# Allegro board NRF52840DEMO.brd
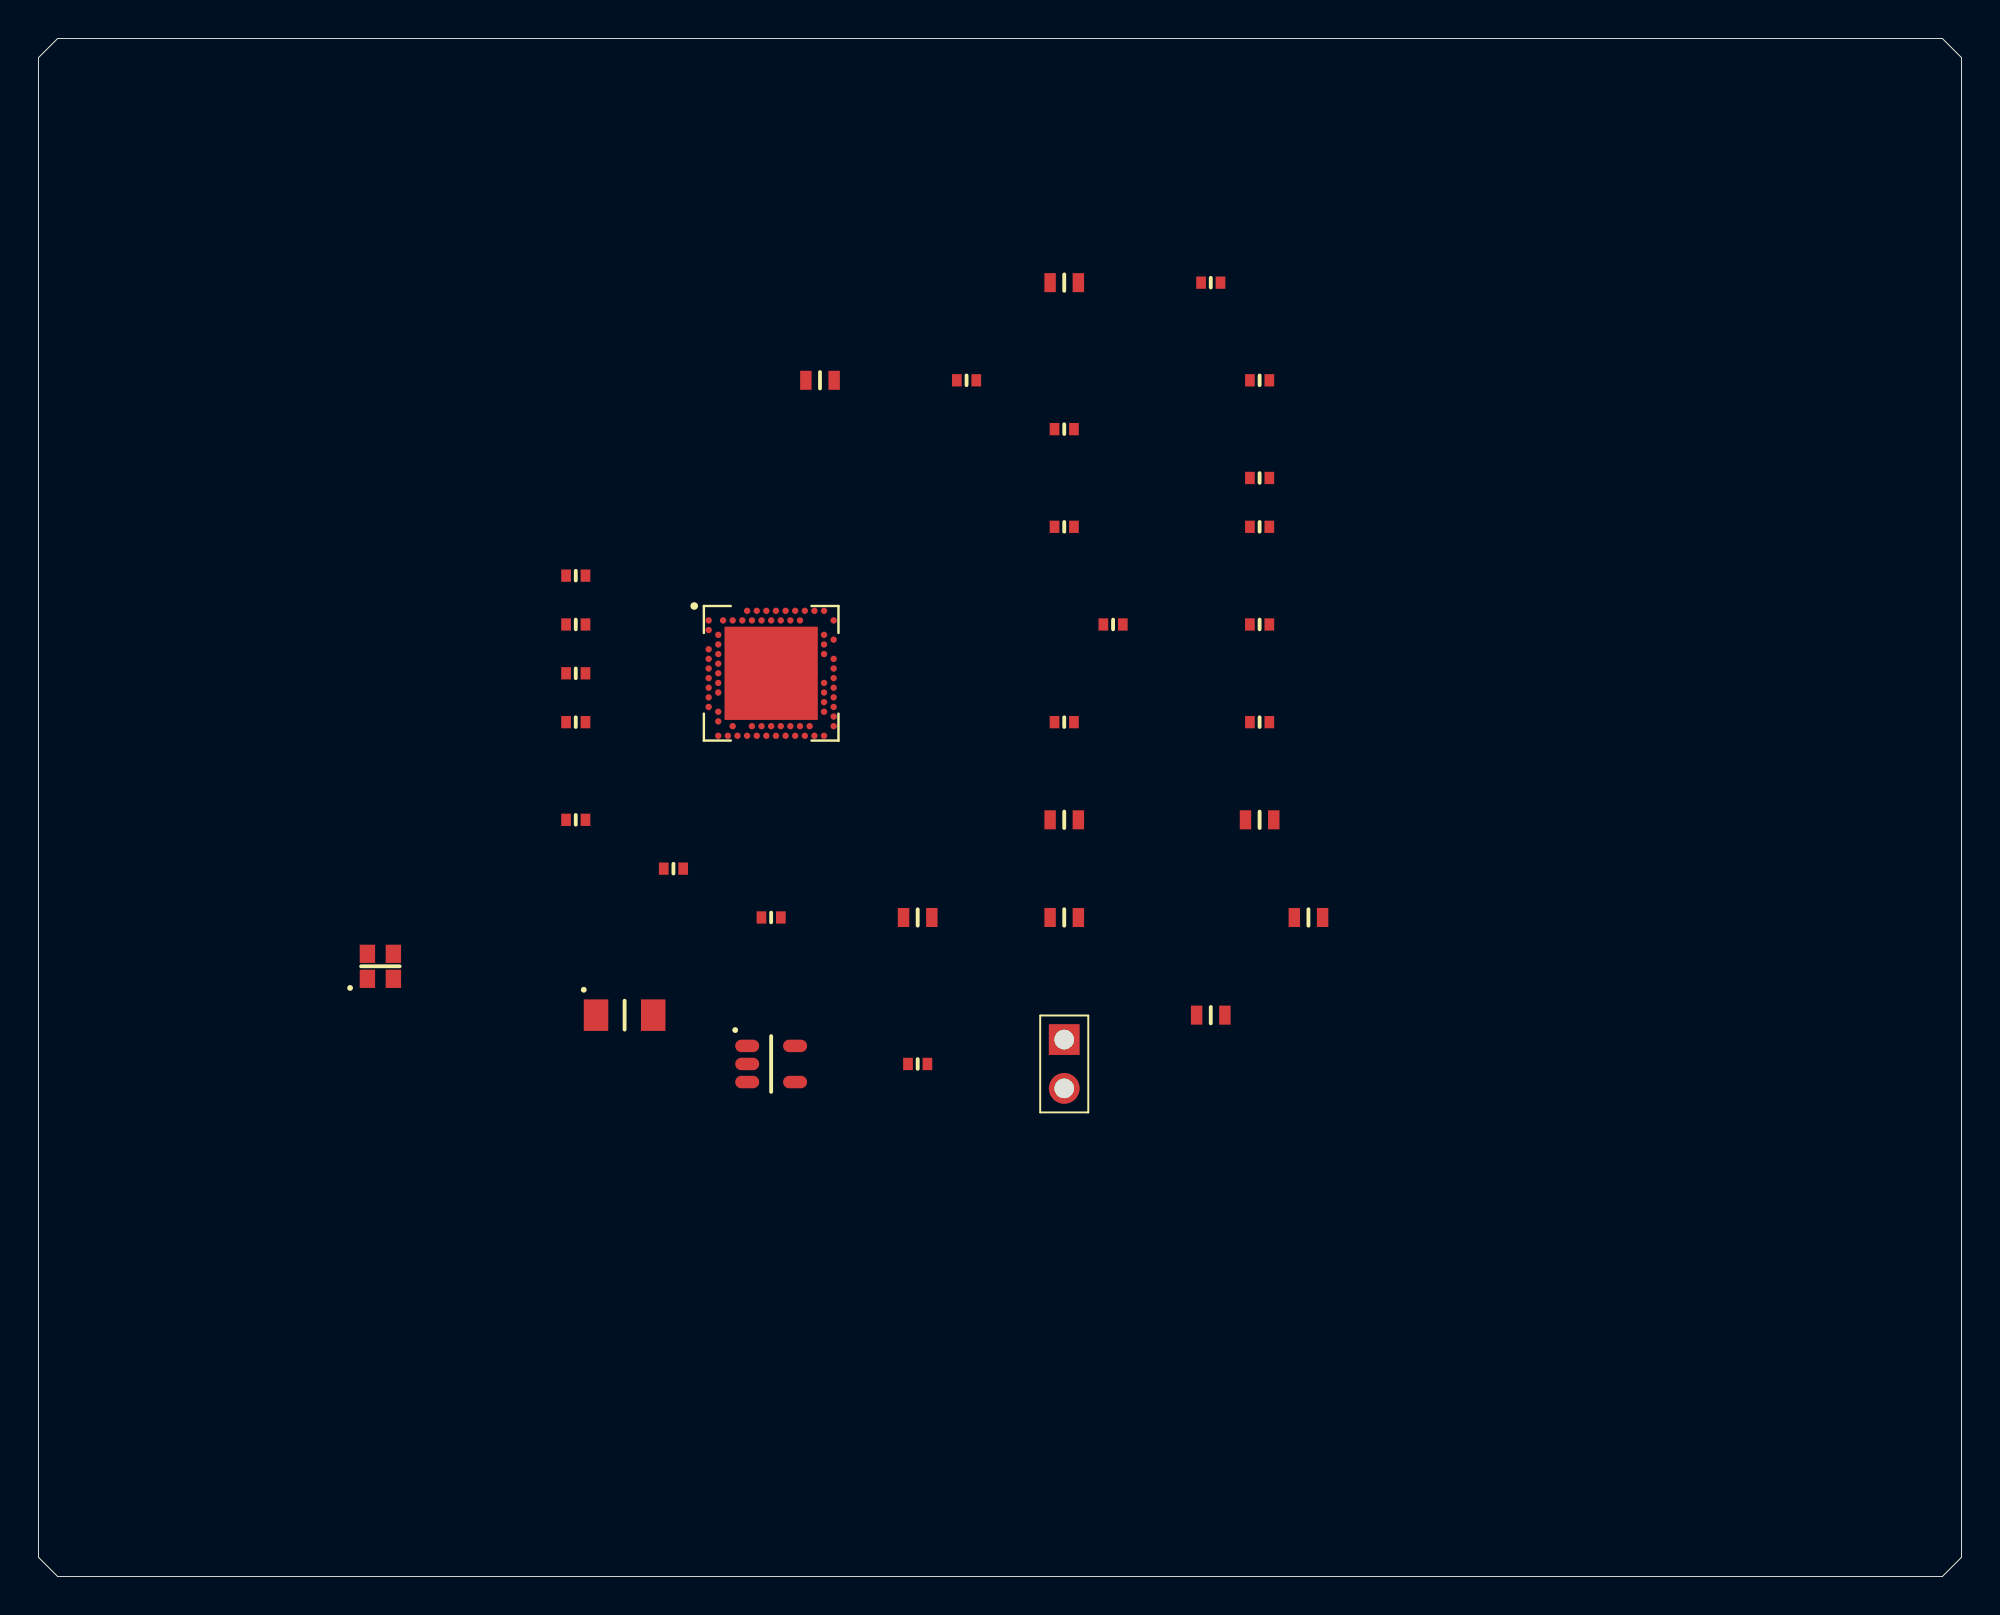
[diagram p0: board, top side]
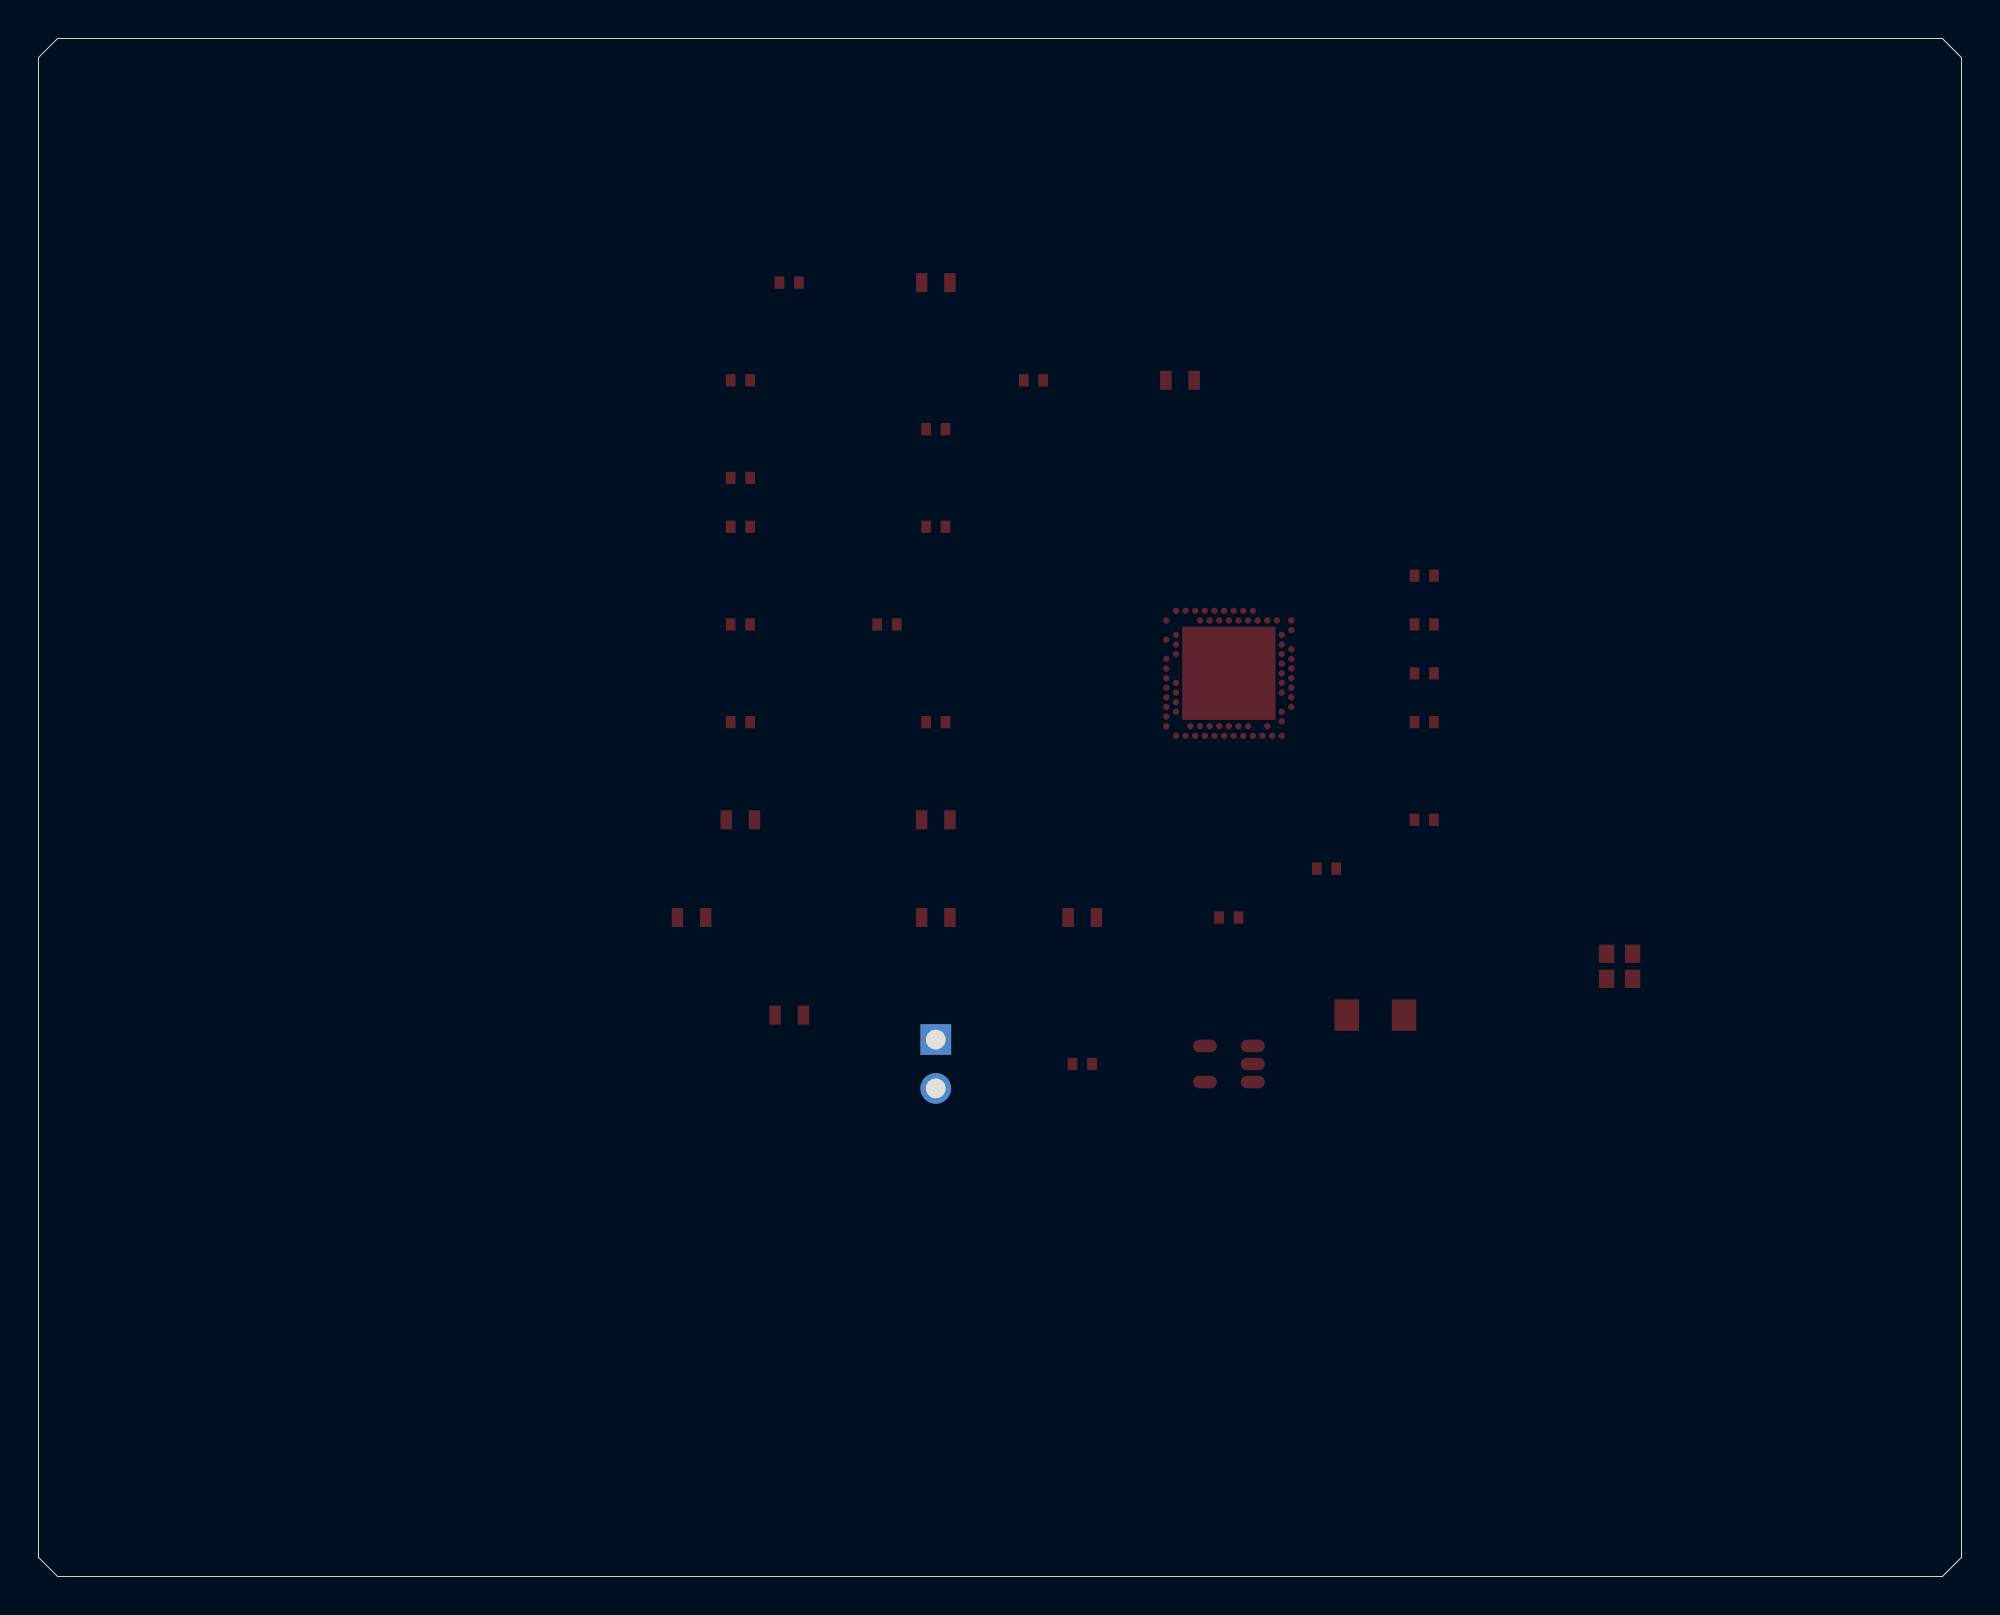
[diagram p1: board, bottom side, seen from below]

Outline 100 x 80 mm; copper layers: TOP, BOTTOM. Coordinates in mm from the lower left corner of the outline.
Outline path: 0,79 0,1 1,0 99,0 100,1 100,79 99,80 1,80 0,79

## Design rules (mm)
constraint set DEFAULT: min track width 0.127

## Placement (name value [footprint] x y rotation side)
C1  1.0pF  [CAPC1005X55N]  27.94 52.06 0 top
C2  1.0pF  [CAPC1005X55N]  27.94 49.52 0 top
C3  DNM  [CAPC1005X55N]  27.94 46.98 0 top
C4  12pF  [CAPC1005X55N]  27.94 44.44 0 top
C5  12pF  [CAPC1005X55N]  27.94 39.36 0 top
C6  12pF  [CAPC1005X55N]  33.02 36.82 0 top
C7  12pF  [CAPC1005X55N]  38.1 34.28 0 top
C8  1.0uF  [CAPC1609X50N]  45.72 34.28 0 top
C9  4.7uF  [CAPC1609X50N]  53.34 34.28 0 top
C10  1.0uF  [CAPC1609X50N]  53.34 39.36 0 top
C11  DNM  [CAPC1005X55N]  53.34 44.44 0 top
C12  0.10uF  [CAPC1005X55N]  55.88 49.52 0 top
C13  DNM  [CAPC1005X55N]  53.34 54.6 0 top
C14  100pF  [CAPC1005X55N]  53.34 59.68 0 top
C15  DNM  [CAPC1005X55N]  48.26 62.22 0 top
C16  1.0uF  [CAPC1609X50N]  40.64 62.22 0 top
C17  4.7uF  [CAPC1609X50N]  53.34 67.3 0 top
C18  820pF  [CAPC1005X55N]  60.96 67.3 0 top
C19  0.10uF  [CAPC1005X55N]  63.5 62.22 0 top
C20  0.10uF  [CAPC1005X55N]  63.5 57.14 0 top
C21  0.10uF  [CAPC1005X55N]  63.5 54.6 0 top
C22  0.10uF  [CAPC1005X55N]  63.5 49.52 0 top
C23  0.10uF  [CAPC1005X55N]  63.5 44.44 0 top
C24  1.0uF  [CAPC1609X50N]  63.5 39.36 0 top
C25  4.7uF  [CAPC1609X50N]  66.04 34.28 0 top
C26  1.0uF  [CAPC1609X50N]  60.96 29.2 0 top
J1  HEADER2  [PIN254-2N]  53.34 26.66 0 top
L1  3.9nH  [INDC1005X45N]  45.72 26.66 0 top
U1  NRF52840-QIAA-R7  [NORDIC_NRF52840-QIAA-R7]  38.1 46.98 0 top
U2  RT9013  [SOT94P279X129-5N]  38.1 26.66 0 top
Y1  32.768KHz  [OSCSC254P320X150X100-2N]  30.48 29.2 0 top
Y2  32MHz  [OSCCC160X200X50-4N]  17.78 31.74 0 top

## Library data of the parts
C1-C26 = CAP NP
J1 = HEADER 2
L1 = INDUCTOR
U1 = NRF52840-QIAA-R7
U2 = RT9013
Y1 = CRYSTAL
Y2 = CRYSTAL13-NDK/SM

## Footprints (pads in the part's own frame, mm; a bottom-side part is the same pattern mirrored in y, then rotated)
CAPC1005X55N
  rect 0.505x0.64 smd: 1(-0.505,0) 2(0.505,0)
CAPC1609X50N
  rect 0.595x0.99 smd: 1(-0.735,0) 2(0.735,0)
INDC1005X45N
  rect 0.505x0.64 smd: 1(-0.505,0) 2(0.505,0)
NORDIC_NRF52840-QIAA-R7
  custom 0.33x0.33 smd: A8(-1.25,3.25) A10(-0.75,3.25) A12(-0.25,3.25) A14(0.25,3.25) A16(0.75,3.25) A18(1.25,3.25) A20(1.75,3.25) A22(2.25,3.25) A23(2.75,3.25) AA24(3.25,-2.25) AB2(-2.75,-2.5) AC5(-2,-2.75) AC9(-1,-2.75) AC11(-0.5,-2.75) AC13(0,-2.75) AC15(0.5,-2.75) AC17(1,-2.75) AC19(1.5,-2.75) AC21(2,-2.75) AC24(3.25,-2.75) AD2(-2.75,-3.25) AD4(-2.25,-3.25) AD6(-1.75,-3.25) AD8(-1.25,-3.25) AD10(-0.75,-3.25) AD12(-0.25,-3.25) AD14(0.25,-3.25) AD16(0.75,-3.25) AD18(1.25,-3.25) AD20(1.75,-3.25) AD22(2.25,-3.25) AD23(2.75,-3.25) B1(-3.25,2.75) B3(-2.5,2.75) B5(-2,2.75) B7(-1.5,2.75) B9(-1,2.75) B11(-0.5,2.75) B13(0,2.75) B15(0.5,2.75) B17(1,2.75) B19(1.5,2.75) B24(3.25,2.75) C1(-3.25,2.25) D2(-2.75,2) D23(2.75,2) E24(3.25,1.75) F2(-2.75,1.5) F23(2.75,1.5) G1(-3.25,1.25) H2(-2.75,1) H23(2.75,1) J1(-3.25,0.75) J24(3.25,0.75) K2(-2.75,0.5) L1(-3.25,0.25) L24(3.25,0.25) M2(-2.75,0) N1(-3.25,-0.25) N24(3.25,-0.25) P2(-2.75,-0.5) P23(2.75,-0.5) R1(-3.25,-0.75) R24(3.25,-0.75) T2(-2.75,-1) T23(2.75,-1) U1(-3.25,-1.25) U24(3.25,-1.25) V23(2.75,-1.5) W1(-3.25,-1.75) W24(3.25,-1.75) Y2(-2.75,-2) Y23(2.75,-2)
  rect 4.85x4.85 smd: EXP(0,0)
OSCCC160X200X50-4N
  rect 0.8x0.95 smd: 1(-0.675,-0.65) 2(0.675,-0.65) 3(0.675,0.65) 4(-0.675,0.65)
OSCSC254P320X150X100-2N
  rect 1.275x1.64 smd: 1(-1.488,0) 2(1.488,0)
PIN254-2N
  rect 1.6x1.6 hole 1.02: 1(0,1.27)
  round 1.6 hole 1.02: 2(0,-1.27)
SOT94P279X129-5N
  oval 1.25x0.65 smd: 1(-1.244,0.94) 2(-1.244,0) 3(-1.244,-0.94) 4(1.244,-0.94) 5(1.244,0.94)

## Nets
+3V3: C10.1 C19.1 C20.1 C21.1 C22.1 C23.1 C25.1 C26.1 U1.A22 U1.AD14 U1.AD23 U1.B1 U1.W1 U2.5(VOUT)
+5V0: C8.2 J1.1 U2.1 U2.3
GND: C1.2 C2.2 C3.2 C4.1 C5.2 C6.2 C7.2 C8.1 C9.2 C10.2 C11.1 C12.1 C13.1 C14.1 C15.1 C16.2 C17.2 C18.2 C19.2 C20.2 C21.2 C22.2 C23.2 C24.2 C25.2 C26.2 J1.2 U1.B7 U1.EXP U1.F23 U2.2 Y2.2 Y2.4
VBUS: C17.1 U1.AD2 U1.Y2
ANT: C1.1 L1.1 U1.H23
N03316: C4.2 U1.D2 Y1.2
N03329: C5.1 U1.F2 Y1.1
N03707: C6.1 U1.AC24 Y2.1
N03752: C7.1 U1.AA24 Y2.3
N06119: C2.1 C3.1 L1.2
N06603: C14.2 U1.D23
N07010: C15.2 C16.1 U1.B5 U1.E24
N07312: C18.1 U1.N24
N07512: C12.2 U1.C1
N07833: C13.2 U1.A18
N08835: C24.1 U1.B3
N09358: C9.1 U1.AC5
N09424: C11.2 U1.AB2

Pads without a net: U1 A8 A10 A12 A14 A16 A20 A23 AC9 AC11 AC13 AC15 AC17 AC19 AC21 AD4 AD6 AD8 AD10 AD12 AD16 AD18 AD20 AD22 B9 B11 B13 B15 B17 B19 B24 G1 H2 J1 J24 K2 L1 L24 M2 N1 P2 P23 R1 R24 T2 T23 U1 U24 V23 W24 Y23; U2 4
